# EAGLE board FOCDriverManual (EAGLE 7.7.0)
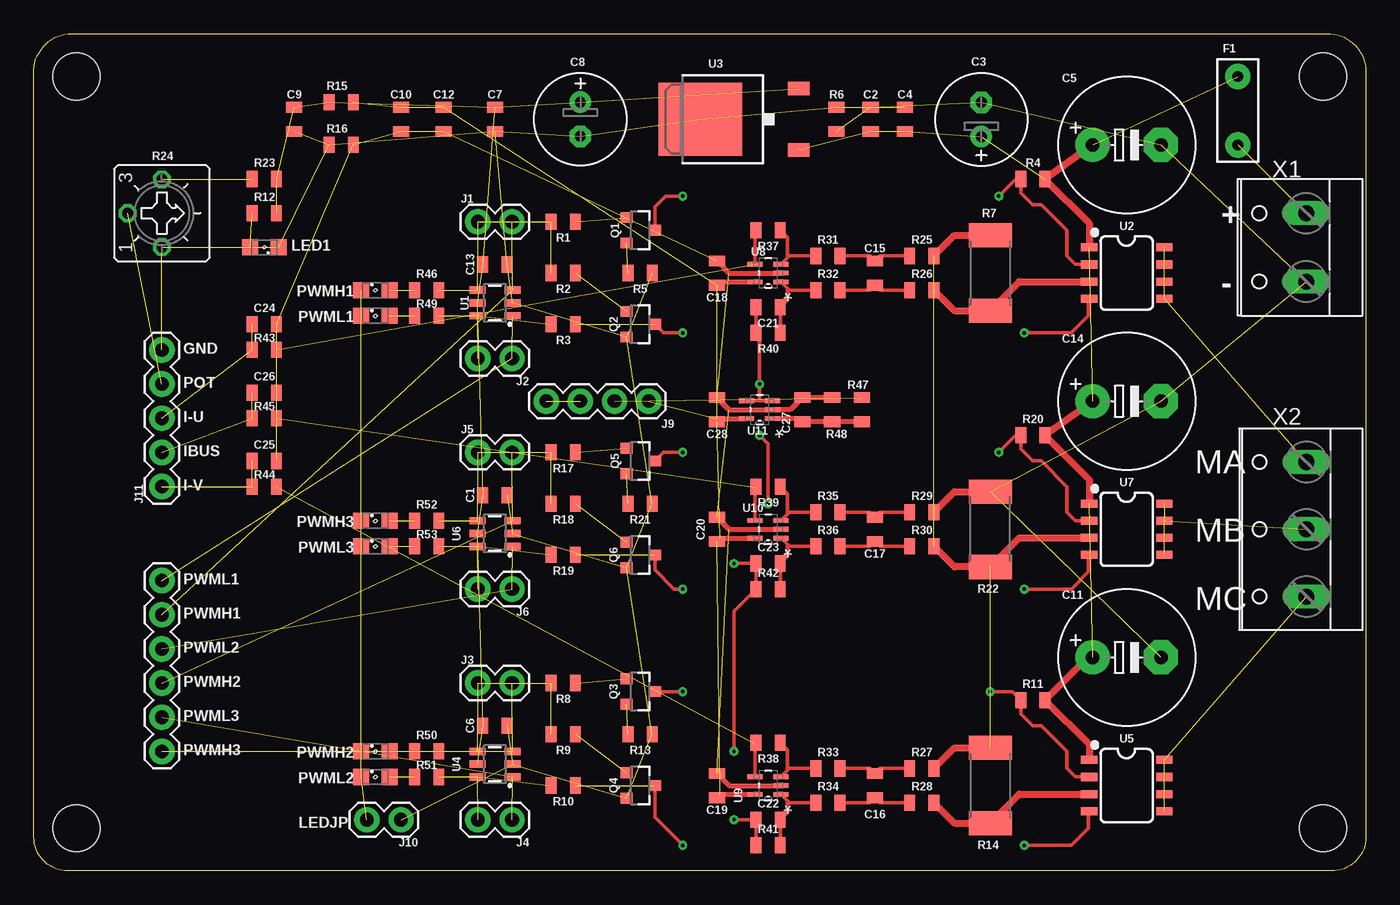
[diagram p0: board, top side]
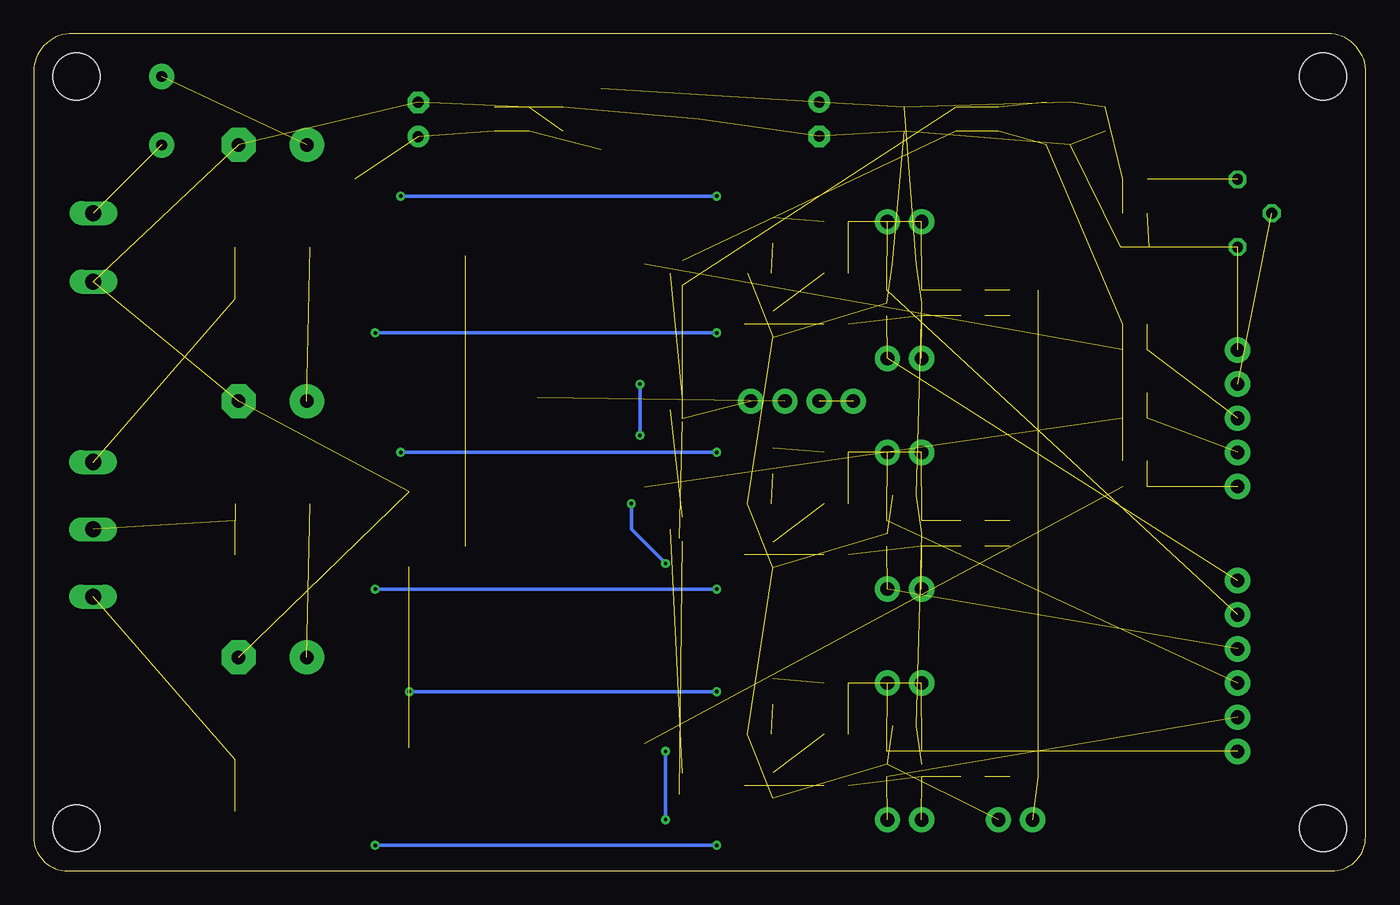
[diagram p1: board, bottom side, seen from below]

Size 99.08 x 62.25 mm. Coordinates in mm from the lower left corner, seen from the top.
Outline: 2.56,0 arc-90 0.02,2.54 0.02,59.05 arc-90 2.56,62.23 95.9,62.23 arc-90 99.08,59.69 99.08,2.54 arc-90 96.54,0 2.56,0
Copper layers (1*16): Top 0.035mm / dielectric 1.5mm / Bottom 0.035mm
Design rules "default *": minimum track width 10mil, minimum drill 10mil, track to track 8mil, track to pad 8mil, pad to pad 8mil, via to via 8mil, smd to smd 8mil, copper to edge 40mil, drill to drill 8mil, minimum pad ring 10mil, minimum via ring 8mil, stop-mask expansion 4mil, vias tented up to drill 0mil, thermal gap 10mil
Net classes: 0 default: width 0.254 mm, drill 0.254 mm, clearance 0.254 mm; 1 VccIn: width 0.356 mm, drill 0.254 mm, clearance 0.305 mm; 2 gnd: width 0.356 mm, drill 0.254 mm, clearance 0.305 mm; 3 +12V: width 0.508 mm, drill 0.406 mm, clearance 0.305 mm; 4 agnd: width 0.508 mm, drill 0.406 mm, clearance 0.305 mm
Holes 3.5 mm at 95.9,59.05 95.9,3.17 3.19,3.17 3.19,59.05

## Footprints (pad centres in the part's own frame; a part is rotated, then mirrored left to right if it is on the bottom)
0805 = smd 0.8 x 1.2: 1 -0.9,0; 2 0.9,0
E2,5-7 = drill 0.813 pad 1.6: + -1.27,0 | drill 0.813 pad 1.6 octagon: - 1.27,0
E5-10,5 = drill 1.016 pad 2.54: + -2.54,0 | drill 1.016 pad 2.54 octagon: - 2.54,0
PTH = drill 0.8 pad 1.88: P$1 -2.54,0; P$2 2.54,0
1X02 = drill 1.016 pad 1.88: 1 0,0; 2 2.54,0
1X06 = drill 1.016 pad 1.88: 1 0,0; 2 2.54,0; 3 5.08,0; 4 7.62,0; 5 10.16,0; 6 12.7,0
1X04 = drill 1.016 pad 1.88: 1 0,0; 2 2.54,0; 3 5.08,0; 4 7.62,0
1X05 = drill 1.016 pad 1.88: 1 0,0; 2 2.54,0; 3 5.08,0; 4 7.62,0; 5 10.16,0
SML0805 = smd 1.2 x 1.2: A 1.05,0; C -1.05,0
SOT23-3 = smd 0.8 x 0.9: 1 -0.95,-1; 2 0.95,-1; 3 0,1.1
R2512 = smd 1.8 x 3.2: 1 -2.8,0; 2 2.8,0
CT6 = drill 0.813 octagon: A 2.515,0; E -2.515,0; S 0,-2.54
SOT23-6 = smd 0.55 x 1.2: 1 0.95,1.3; 2 0,1.3; 3 -0.95,1.3; 4 -0.95,-1.3; 5 0,-1.3; 6 0.95,-1.3
SO08 = smd 0.6 x 1.2: 1 -1.905,-2.8; 2 -0.635,-2.8; 3 0.635,-2.8; 4 1.905,-2.8; 5 1.905,2.8; 6 0.635,2.8; 7 -0.635,2.8; 8 -1.905,2.8
TO-252 = smd 1 x 1.6: 1 -2.28,-4.8; 2 2.28,-4.8 | smd 5.4 x 6.2: 3 0,2.5
SOT65P210X110-5N = smd 1.118 x 0.356: 1 -0.965,0.66; 2 -0.965,0; 3 -0.965,-0.66; 4 0.965,-0.66; 5 0.965,0.66
W237-132 = drill 1.194 long: 1 -2.54,-0.635; 2 2.54,-0.635
W237-103 = drill 1.194 long: 1 -5,-1.29; 2 0,-1.29; 3 5,-1.29

## Placement (x,y rotation side)
C1  0.1uF  [0805]  34.31,27.94 0 top
C2  0.1uF  [0805]  62.25,55.88 90 top
C3  47uF/50V  [E2,5-7]  70.48,55.86 90 top
C4  0.1uF  [0805]  64.79,55.88 90 top
C5  220uF/63V  [E5-10,5]  81.3,53.98 0 top
C6  0.1uF  [0805]  34.31,10.79 0 top
C7  0.1uF  [0805]  34.31,55.88 270 top
C8  47uF/50V  [E2,5-7]  40.66,55.88 270 top
C9  0.1uF  [0805]  19.38,55.88 270 top
C10  0.1uF  [0805]  27.32,55.88 270 top
C11  220uF/63V  [E5-10,5]  81.3,15.88 0 top
C12  0.1uF  [0805]  30.5,55.88 270 top
C13  0.1uF  [0805]  34.31,45.09 0 top
C14  220uF/63V  [E5-10,5]  81.3,34.92 0 top
C15  56pF  [0805]  62.56,44.45 270 top
C16  56pF  [0805]  62.56,6.35 270 top
C17  56pF  [0805]  62.56,25.4 270 top
C18  0.1uF  [0805]  50.82,44.45 90 top
C19  0.1uF  [0805]  50.82,6.35 90 top
C20  0.1uF  [0805]  50.82,25.4 90 top
C21  100pF  [0805]  54.63,41.91 0 top
C22  100pF  [0805]  54.63,3.81 0 top
C23  100pF  [0805]  54.63,22.86 0 top
C24  1nF  [0805]  17.16,40.64 0 top
C25  1nF  [0805]  17.16,30.48 0 top
C26  1nF  [0805]  17.16,35.56 0 top
C27  0.1uF  [0805]  57.17,34.29 90 top
C28  0.1uF  [0805]  50.82,34.29 90 top
F1  4A/30V  [PTH]  89.55,56.52 90 top
J1  [1X02]  35.58,48.26 180 top
J2  [1X02]  35.58,38.1 180 top
J3  [1X02]  35.58,13.97 180 top
J4  [1X02]  35.58,3.81 180 top
J5  [1X02]  35.58,31.11 180 top
J6  [1X02]  35.58,20.95 180 top
J8  [1X06]  9.54,21.59 270 top
J9  [1X04]  38.12,34.92 0 top
J10  [1X02]  24.78,3.81 0 top
J11  [1X05]  9.54,28.57 90 top
LED1  ORANGE  [SML0805]  17.16,46.35 180 top
LED2  GREEN  [SML0805]  25.42,43.18 0 top
LED3  GREEN  [SML0805]  25.42,41.27 0 top
LED4  GREEN  [SML0805]  25.42,8.89 0 top
LED5  GREEN  [SML0805]  25.42,6.99 0 top
LED6  GREEN  [SML0805]  25.42,26.04 0 top
LED7  GREEN  [SML0805]  25.42,24.13 0 top
Q1  BC817  [SOT23-3]  45.1,47.62 270 top
Q2  BC817  [SOT23-3]  45.1,40.64 270 top
Q3  BC817  [SOT23-3]  45.1,13.34 270 top
Q4  BC817  [SOT23-3]  45.1,6.35 270 top
Q5  BC817  [SOT23-3]  45.1,30.48 270 top
Q6  BC817  [SOT23-3]  45.1,23.5 270 top
R1  1K  [0805]  39.39,48.26 0 top
R2  1K  [0805]  39.39,44.45 0 top
R3  1K  [0805]  39.39,40.64 0 top
R4  330  [0805]  74.31,51.44 0 top
R5  180  [0805]  45.1,44.45 180 top
R6  0R  [0805]  59.71,55.88 90 top
R7  0.025R 2W 1%  [R2512]  71.14,44.45 270 top
R8  1K  [0805]  39.39,13.97 0 top
R9  1K  [0805]  39.39,10.16 0 top
R10  1K  [0805]  39.39,6.35 0 top
R11  330  [0805]  74.31,12.7 0 top
R12  330  [0805]  17.16,48.9 0 top
R13  180  [0805]  45.1,10.16 180 top
R14  0.025R 2W 1%  [R2512]  71.14,6.35 270 top
R15  1R  [0805]  22.88,57.15 0 top
R16  0R  [0805]  22.88,53.98 0 top
R17  1K  [0805]  39.39,31.11 0 top
R18  1K  [0805]  39.39,27.3 0 top
R19  1K  [0805]  39.39,23.5 0 top
R20  330  [0805]  74.31,32.38 0 top
R21  180  [0805]  45.1,27.3 180 top
R22  0.025R 2W 1%  [R2512]  71.14,25.4 90 top
R23  5.6K  [0805]  17.16,51.44 0 top
R24  10K  [CT6]  9.54,48.9 270 top
R25  1K 1%  [0805]  66.06,45.72 180 top
R26  1K 1%  [0805]  66.06,43.18 180 top
R27  1K 1%  [0805]  66.06,7.62 180 top
R28  1K 1%  [0805]  66.06,5.08 180 top
R29  1K 1%  [0805]  66.06,26.67 180 top
R30  1K 1%  [0805]  66.06,24.13 180 top
R31  1K 1%  [0805]  59.07,45.72 180 top
R32  1K 1%  [0805]  59.07,43.18 180 top
R33  1K 1%  [0805]  59.07,7.62 180 top
R34  1K 1%  [0805]  59.07,5.08 180 top
R35  1K 1%  [0805]  59.07,26.67 180 top
R36  1K 1%  [0805]  59.07,24.13 180 top
R37  10K 1%  [0805]  54.63,47.62 180 top
R38  10K 1%  [0805]  54.63,9.53 180 top
R39  10K 1%  [0805]  54.63,28.57 180 top
R40  10K 1%  [0805]  54.63,40.01 180 top
R41  10K 1%  [0805]  54.63,1.91 180 top
R42  10K 1%  [0805]  54.63,20.95 180 top
R43  1K 1%  [0805]  17.16,38.73 180 top
R44  1K 1%  [0805]  17.16,28.57 180 top
R45  1K 1%  [0805]  17.16,33.66 180 top
R46  220  [0805]  29.23,43.18 0 top
R47  10K 1%  [0805]  61.61,34.29 90 top
R48  10K 1%  [0805]  59.39,34.29 270 top
R49  220  [0805]  29.23,41.27 0 top
R50  220  [0805]  29.23,8.89 0 top
R51  220  [0805]  29.23,6.99 0 top
R52  220  [0805]  29.23,26.04 0 top
R53  220  [0805]  29.23,24.13 0 top
U1  SN74LVC2G17  [SOT23-6]  34.31,42.23 270 top
U2  AO4606  [SO08]  81.3,44.45 270 top
U3  BA7805FP  [TO-252]  52.09,55.88 90 top
U4  SN74LVC2G17  [SOT23-6]  34.31,7.94 270 top
U5  AO4606  [SO08]  81.3,6.35 270 top
U6  SN74LVC2G17  [SOT23-6]  34.31,25.08 270 top
U7  AO4606  [SO08]  81.3,25.4 270 top
U8  LMV321SQ3T2G  [SOT65P210X110-5N]  54.63,44.45 180 top
U9  LMV321SQ3T2G  [SOT65P210X110-5N]  54.63,6.35 180 top
U10  LMV321SQ3T2G  [SOT65P210X110-5N]  54.63,25.4 180 top
U11  LMV321SQ3T2G  [SOT65P210X110-5N]  53.99,34.29 180 top
X1  [W237-132]  94,46.35 90 top
X2  [W237-103]  93.36,25.4 90 top

## Library data of the parts
C1 C2 C4 C6 C7 C9 C10 C12 C13 C15-C28 = SparkFun-Capacitors; PROD_ID: CAP-08064
C3 C5 C8 C11 C14 = rcl
F1 = SparkFun-Fuses; PROD_ID: RES-08490
J1-J6 J10 J11 = SparkFun-Connectors
J8 = SparkFun-Connectors; PROD_ID: CONN-08437
J9 = SparkFun-Connectors; PROD_ID: CONN-09696
LED1-LED7 = led
Q1-Q6 = SparkFun-DiscreteSemi; PROD_ID: TRANS-08049
R1-R6 R8-R13 R15-R21 R23 R25-R53 = SparkFun-Resistors
R7 R14 R22 = resistor
R24 = pot
U1 U4 U6 = SN74LVC
U2 U5 U7 = AO4606
U3 = SparkFun-IC-Power; PROD_ID: VREG-12370
U8-U11 = LMV321SQ3T2G
X1 = con-wago-508; OC_FARNELL: unknown; OC_NEWARK: unknown
X2 = con-wago-500; MPN: 237-103; OC_FARNELL: unknown; OC_NEWARK: 18M7116

## Nets
3V3FROMMCU: J9.1 J9.2
5V [VccIn]: C1.1 C6.1 C7.1 C8.+ C9.1 C13.1 R12.2 R15.1 R23.2 U1.5 U3.2 U4.5 U6.5
AGND [gnd]: C10.2 C12.2 C18.2 C19.2 C20.2 C24.2 C25.2 C26.2 C27.2 C28.2 R16.2 R48.1 U8.2 U9.2 U10.2 U11.2
DGND [gnd]: C1.2 C4.2 C6.2 C7.2 C8.- C9.2 C13.2 J10.2 J11.5 LED1.C Q2.2 Q4.2 Q6.2 R5.1 R6.2 R13.1 R16.1 R21.1 R24.A U1.2 U3.3 U4.2 U6.2
GND [agnd]: C2.2 C3.- C5.- C11.- C14.- R6.1 R22.2 R29.1 X1.1
H1: J1.1 J8.2 U1.3
H1O: J1.2 R1.1 R2.1 R46.2 U1.4
H2: J3.1 J8.6 U4.3
H2O: J3.2 R8.1 R9.1 R50.2 U4.4
H3: J5.1 J8.4 U6.3
H3O: J5.2 R17.1 R18.1 R52.2 U6.4
ICOM [agnd]: R7.1 R14.1 R22.1 R25.1 R27.1 R30.1 U7.3
IMOTORA: C24.1 J11.3 R43.2
IMOTORB: C25.1 J11.1 R44.2
IMOTORBUS: C26.1 J11.2 R45.2
IU [agnd]: R7.2 R26.1 U2.3
IV [agnd]: R14.2 R28.1 U5.3
L1: J2.1 J8.1 U1.1
L1O: J2.2 R3.1 R49.2 U1.6
L2: J4.1 J8.5 U4.1
L2O: J4.2 R10.1 R51.2 U4.6
L3: J6.1 J8.3 U6.1
L3O: J6.2 R19.1 R53.2 U6.6
LEDJP1: J10.1 LED2.C LED3.C LED4.C LED5.C LED6.C LED7.C
M1 [+12V]: U2.5 U2.6 U2.7 U2.8 X2.3
M2 [+12V]: U5.5 U5.6 U5.7 U5.8 X2.1
M3 [+12V]: U7.5 U7.6 U7.7 U7.8 X2.2
N$3: Q6.3 R19.2 U7.4
N$4: R23.1 R24.E
N$5 [+12V]: F1.P$1 X1.2
N$6: Q5.3 R20.1 U7.2
N$7: Q4.3 R10.2 U5.4
N$8: Q3.3 R11.1 U5.2
N$9: Q2.3 R3.2 U2.4
N$10: Q1.3 R4.1 U2.2
N$11: C15.1 R25.2 R31.1
N$12: C15.2 R26.2 R32.1
N$13: R31.2 R37.1 U8.3
N$14: C16.1 R27.2 R33.1
N$15: C21.2 R32.2 R40.1 U8.1
N$16: R37.2 R43.1 U8.4
N$17: C16.2 R28.2 R34.1
N$18: C27.1 R47.1 R48.2 U11.1
N$19: R33.2 R38.1 U9.3
N$20: C22.2 R34.2 R41.1 U9.1
N$21: R38.2 R44.1 U9.4
N$22: C17.1 R29.2 R35.1
N$23: C17.2 R30.2 R36.1
N$24: R35.2 R39.1 U10.3
N$25: C23.2 R36.2 R42.1 U10.1
N$26: R39.2 R45.1 U10.4
N$28: Q5.2 R21.2
N$30: Q1.1 R1.2
N$31: LED1.A R12.1
N$32: Q2.1 R2.2
N$33: LED2.A R46.1
N$34: LED3.A R49.1
N$35: LED4.A R50.1
N$36: LED5.A R51.1
N$37: LED6.A R52.1
N$38: LED7.A R53.1
N$39: Q3.1 R8.2
N$40: Q1.2 R5.2
N$41: Q4.1 R9.2
N$42: Q5.1 R17.2
N$43: Q3.2 R13.2
N$44: Q6.1 R18.2
POT: J11.4 R24.S
PWRDIV: J9.3 R47.2
VDDA [VccIn]: C10.1 C12.1 C18.1 C19.1 C20.1 C28.1 J9.4 R15.2 U8.5 U9.5 U10.5 U11.5
VIN [+12V]: C2.1 C3.+ C4.1 C5.+ C11.+ C14.+ F1.P$2 R4.2 R11.2 R20.2 U2.1 U3.1 U5.1 U7.1
VREF: C21.1 C22.1 C23.1 R40.2 R41.2 R42.2 U11.3 U11.4

## Tracks (layer width: path | path; a pad name or v marks a point on that pad's centre or on a via)
3V3FROMMCU  (1 unrouted)
5V  (12 unrouted)
AGND  (9 unrouted)
  Top 0.356: C28.2 51.72,34.29 U11.2 56.27,34.29 C27.2 R48.1 | C20.2 51.72,25.4 U10.2 | C19.2 51.72,6.35 U9.2 | C18.2 51.72,44.45 U8.2
DGND  (22 unrouted)
GND  (7 unrouted)
  Top 0.508: R29.1 68.49,28.2 R22.2
H1  (2 unrouted)
H1O  (4 unrouted)
H2  (2 unrouted)
H2O  (4 unrouted)
H3  (2 unrouted)
H3O  (4 unrouted)
ICOM  (2 unrouted)
  Top 0.508: R25.1 68.49,47.25 R7.1 | U7.3 73.3,24.77 R22.1 68.49,22.6 R30.1 | R27.1 68.49,9.15 R14.1
IMOTORA  (2 unrouted)
IMOTORB  (2 unrouted)
IMOTORBUS  (2 unrouted)
IU
  Top 0.508: R26.1 68.49,41.65 R7.2 73.3,43.81 U2.3
IV
  Top 0.508: R28.1 68.49,3.55 R14.2 73.3,5.71 U5.3
L1  (2 unrouted)
L1O  (3 unrouted)
L2  (2 unrouted)
L2O  (3 unrouted)
L3  (2 unrouted)
L3O  (3 unrouted)
LEDJP1  (6 unrouted)
M1  (4 unrouted)
M2  (4 unrouted)
M3  (4 unrouted)
N$3  (via drill 0.25)  (1 unrouted)
  Top 0.254: Q6.3 46.2,22.39 47.64,20.95 v48.28,20.95 | v73.68,20.95 77.17,20.95 78.44,22.23 78.44,23.44 U7.4
  Bottom 0.254: v48.28,20.95 v73.68,20.95
N$4  (1 unrouted)
N$5  (1 unrouted)
N$6  (via drill 0.25)
  Top 0.254: Q5.3 46.84,31.11 v48.28,31.11 | v71.77,31.11 73.04,32.38 R20.1 73.41,31.38 74.31,30.48 74.95,30.48 76.85,28.57 76.85,26.67 77.49,26.04 U7.2
  Bottom 0.254: v48.28,31.11 v71.77,31.11
N$7  (via drill 0.25)  (1 unrouted)
  Top 0.254: Q4.3 46.2,3.98 v48.28,1.91 | v73.68,1.91 77.17,1.91 78.44,3.17 78.44,4.39 U5.4
  Bottom 0.254: v48.28,1.91 v73.68,1.91
N$8  (via drill 0.25)
  Top 0.254: Q3.3 v48.28,13.34 | v71.14,13.34 72.78,13.34 R11.1 73.41,11.7 74.31,10.79 74.95,10.79 76.85,8.89 76.85,7.62 77.49,6.99 U5.2
  Bottom 0.254: v48.28,13.34 v71.14,13.34
N$9  (via drill 0.25)  (1 unrouted)
  Top 0.254: v73.68,40.01 77.17,40.01 78.44,41.27 78.44,42.49 U2.4 | Q2.3 46.84,40.01 v48.28,40.01
  Bottom 0.254: v48.28,40.01 v73.68,40.01
N$10  (via drill 0.25)
  Top 0.254: v71.77,50.16 73.04,51.44 R4.1 73.41,50.43 74.31,49.53 74.95,49.53 76.85,47.62 76.85,45.72 77.49,45.09 U2.2 | Q1.3 46.2,49.36 47.01,50.16 v48.28,50.16
  Bottom 0.254: v48.28,50.16 v71.77,50.16
N$11
  Top 0.254: R31.1 62.2,45.72 C15.1 62.93,45.72 R25.2
N$12
  Top 0.254: R26.2 62.93,43.18 C15.2 62.2,43.18 R32.1
N$13
  Top 0.254: R31.2 56.2,45.72 56.05,45.57 | 56.05,45.57 U8.3 | R37.1 56.05,47.1 56.05,45.57
N$14
  Top 0.254: R33.1 62.2,7.62 C16.1 62.93,7.62 R27.2
N$15
  Top 0.254: R40.1 C21.2 56.05,42.43 56.05,43.33 | R32.2 56.2,43.18 56.05,43.33 | 56.05,43.33 U8.1
N$16  (1 unrouted)
  Top 0.254: R37.2 53.66,47.56 U8.4
N$17
  Top 0.254: R34.1 62.2,5.08 C16.2 62.93,5.08 R28.2
N$18
  Top 0.356: U11.1 57.17,33.63 C27.1 R48.2 R47.1
N$19
  Top 0.254: R33.2 56.2,7.62 56.05,7.47 | 56.05,7.47 U9.3 | R38.1 56.05,9 56.05,7.47
N$20
  Top 0.254: R34.2 56.2,5.08 56.05,5.23 | 56.05,5.23 U9.1 | R41.1 C22.2 56.05,4.33 56.05,5.23
N$21  (1 unrouted)
  Top 0.254: R38.2 53.66,9.46 U9.4
N$22
  Top 0.254: R35.1 62.2,26.67 C17.1 62.93,26.67 R29.2
N$23
  Top 0.254: R36.1 62.2,24.13 C17.2 62.93,24.13 R30.2
N$24
  Top 0.254: R35.2 56.2,26.67 56.05,26.52 | 56.05,26.52 U10.3 | R39.1 56.05,28.05 56.05,26.52
N$25
  Top 0.254: R36.2 56.2,24.13 56.05,24.28 | 56.05,24.28 U10.1 | 56.05,24.28 56.05,23.38 C23.2 R42.1
N$26  (1 unrouted)
  Top 0.254: R39.2 53.66,28.51 U10.4
N$28  (1 unrouted)
N$30  (1 unrouted)
N$31  (1 unrouted)
N$32  (1 unrouted)
N$33  (1 unrouted)
N$34  (1 unrouted)
N$35  (1 unrouted)
N$36  (1 unrouted)
N$37  (1 unrouted)
N$38  (1 unrouted)
N$39  (1 unrouted)
N$40  (1 unrouted)
N$41  (1 unrouted)
N$42  (1 unrouted)
N$43  (1 unrouted)
N$44  (1 unrouted)
POT  (1 unrouted)
PWRDIV  (1 unrouted)
VDDA  (7 unrouted)
  Top 0.356: C28.1 50.82,33.63 U11.5 | C20.1 51.06,24.74 U10.5 | C19.1 51.06,5.69 U9.5 | C18.1 51.06,43.79 U8.5
VIN  (7 unrouted)
  Top 0.508: C11.+ 78.39,15.88 R11.2 78.5,9.41 U5.1 | U7.1 78.5,29.1 R20.2 C14.+ | C5.+ R4.2 78.5,48.15 U2.1
VREF  (via drill 0.25)
  Top 0.254: U11.3 53.99,34.95 | 53.99,34.95 U11.4 | v52.09,22.86 C23.1 R42.2 52.09,19.32 v52.09,8.89 | R41.2 C22.1 v52.09,3.81 | C21.1 R40.2 53.99,39.74 v53.99,36.2 53.99,34.95 | v53.99,32.38 54.63,31.75 v54.63,27.3
  Bottom 0.254: v54.63,27.3 54.63,25.4 v52.09,22.86 | v52.09,8.89 v52.09,3.81 | v53.99,32.38 v53.99,36.2

## Text on the board
tPlace: + | PWMH1 | - | PWML1 | GND | POT | I-U | IBUS | MA | I-V | PWMH3 | PWML3 | MB | PWML1 | PWMH1 | MC | PWML2 | PWMH2 | PWML3 | PWMH3 | PWMH2 | PWML2 | LEDJP